# Altium PCB PCB1.PcbDoc (part 2 of 3)
Units mm, origin at the board's own origin, x right, y up, seen from the top; angles counter-clockwise.
Board outline 80 x 55 mm, 4 copper layers (Top Layer, Inner Layer 1, Inner Layer 2, Bottom Layer 1), stack 0.603 mm thick; 136 components, 94 nets, 499 pads, 245 vias.
Unrouted connection lines stored in the file: 1.
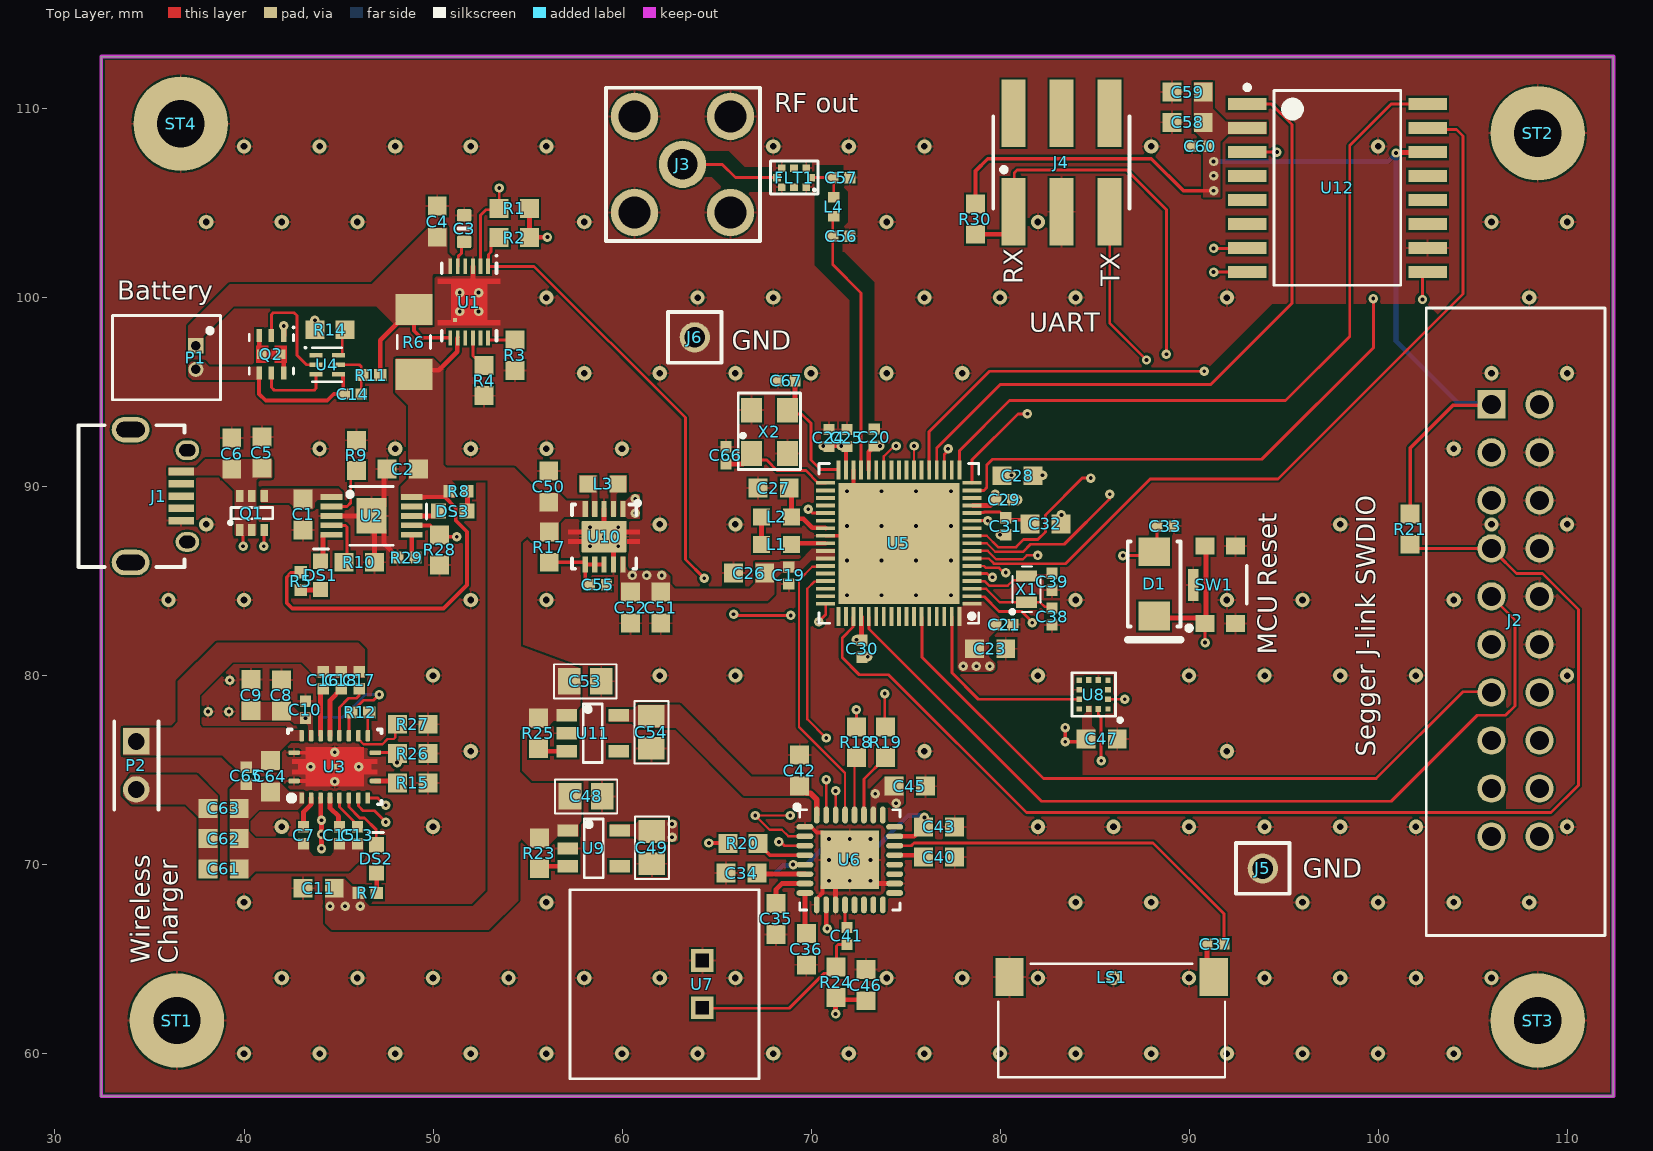
[diagram p0: Top Layer view]

## Part data (continued)
L4: library part CMP-006-00031-2, "MURATA - LQG15HS2N7S02D - INDUCTOR, 2.7NH, 0.8A, 0402, MULTILAYER", Case Code (Imperial)=0402, Case Code (Metric)=1005, Current Rating=300mA, DC Resistance (DCR)=150mR, Inductance=2.7nH, Max Operating Temperature=125°C, Min Operating Temperature=-55°C, Package Quantity=10000, Self Resonant Frequency=6GHz, Test Frequency=100MHz, Case/Package=0402, Core Material=Air, DC Current=300mA, Depth=0.55mm, Height=0.5mm, Height - Seated (Max)=0.022inch, Lead Free="Lead Free", Length=1mm, Max DC Current=300mA, Mfr. Part No.=LQG15HS2N7S02D, Military Standard=Not, Mount="Surface Mount", Packaging="Tape and Reel", Q Factor=8, Radiation Hardening=No, Rated Current-Max=300mA, RoHS Compliant=Yes, Series=LQG15HS, Shielding=Unshielded, Termination=SMD/SMT, Width=0.5mm
LS1: library part CMP-00027-00003-2, "SPEAKER, 12 X 6 MM, 2 MM DEEP, M", Frequency=540Hz, IP Rating=IP67, Manufacturer="CUI Devices", Impedance=32R, Mfr. Part No.=CMR-12062S-67, Sound Pressure Level=120dB
P1: library part CMP-002-00086-2, "MOLEX - 53048-0210 - Wire-To-Board Connector, Right Angle, 1.25 mm, 2 Contacts, Header, PicoBlade 53048 Series", Color=Natural, Contact Resistance=20mR, Current Rating=1A, Flammability Rating="UL94 V-0", Insulation Resistance=100MR, Max Operating Temperature=85°C, Min Operating Temperature=-40°C, Package Quantity=5000, Voltage Rating=125V, Connector Type=Header, Contact Material=Bronze,Brass,Tin, Contact Plating=Tin, Gender=Male, Glow Wire Compliant=Non-compliant, Housing Color=Natural, Housing Material=Nylon, Lead Free="Lead Free", Mount="Through Hole", Number of Circuits=2, Number of Contacts=2, Number of Positions=2, Number of Rows=1, Orientation="Right Angle", Packaging=Tray, Pitch=1.25mm, Radiation Hardening=No, REACH SVHC=Unknown, RoHS Compliant=Yes, Series=PicoBlade, Termination="Through Hole", Voltage Rating (DC)=125V
P2: library part CMP-002-00087-2, "AMPMODU 2 Position 2.54 mm Single Row Through-Hole Straight Breakaway Header", Color=Black, Contact Current Rating=5A, Current Rating=3A, Flammability Rating="UL94 V-0", High Temperature Housing=Yes, Max Operating Temperature=105°C, Min Operating Temperature=-65°C, Package Quantity=500, Approvals=CSA, Board Standoff="No (Without)", Connector Type=Header, Contact Finish - Mating=GOLD, Contact Gender=Male, Contact Material="Copper Alloy", Contact Mating Length=0.23inch, Contact Plating=Gold,Tin,Lead,Matte, Contact Post Length=0.12inch, Contact Protection="No (Without)", Contact Shape=Square, Contact Type="Male Pin", Depth=2.34mm, Fastening Type=Pull, Gasket="No (Without)", High Speed Serial Data Connector=No, Housing Color=Black, Housing Material=Polymer, Insulation Color=Black, Insulation Material=Polymer, Keyed=No, Length=4.67mm, Mating Alignment="No (Without)", Mating Connector Lock="No (Without)", Mfr. Part No.=5-146280-2, Mount="Through Hole", Number of Contacts=2, Number of Positions=2, Number of Rows=1, Orientation=Straight, Packaging=Carton, PCB Mount Retention=Without, PCB Mounting Orientation=Vertical, PCB Thickness=0.063inch, Pins=2, Pitch=2.54mm, Radiation Hardening=No, Row Spacing=2.54mm, Selectively Loaded="No (Without)", Series="AMPMODU MOD II", Stabilizers="No (Without)", Termination="Through Hole"
Q1: library part CMP-013-00036-1, "MOSFET -20V 41mOhm@4.5V 4A P-Ch G-III", Case/Package=SOT-363, Continuous Drain Current (ID)=4A, Drain to Source Breakdown Voltage=-20V, Drain to Source Resistance=41mR, Drain to Source Voltage (Vdss)=20V, Gate to Source Voltage (Vgs)=10V, Max Operating Temperature=150°C, Max Power Dissipation=2.8W, Min Operating Temperature=-55°C, Package Quantity=3000, Power Dissipation=1.6W, Element Configuration=Single, Lead Free="Lead Free", Mount="Surface Mount", Nominal Vgs=-400mV, Number of Channels=1, Number of Elements=1, Number of Pins=6, Packaging="Tape and Reel", Polarity=P-CHANNEL, Radiation Hardening=No, Rds On Max=41mR, REACH SVHC=Unknown, RoHS Compliant=Yes, Series=TrenchFET®, Weight=0.000265oz
Q2: library part CMP-013-00037-4, "MOSFET 2N-CH 20V 5A 6WSON", Continuous Drain Current (ID)=5A, Drain to Source Resistance=23mR, Drain to Source Voltage (Vdss)=20V, Gate to Source Voltage (Vgs)=10V, Input Capacitance=469pF, Max Operating Temperature=150°C, Max Power Dissipation=2.3W, Min Operating Temperature=-55°C, Package Quantity=3000, Contact Plating=Tin, Element Configuration=Dual, Fall Time=15ns, FET Type="2 N-Channel", Height=0.8mm, Lead Free="Lead Free", Length=2.1mm, Mfr. Part No.=CSD85301Q2, Mount="Surface Mount", Number of Channels=2, Number of Pins=6, Packaging="Tape and Reel", Rds On Max=27mR, Rise Time=26ns, RoHS Compliant=Yes, Turn-Off Delay Time=14ns, Turn-On Delay Time=6ns, Weight=0.000342oz, Width=2.1mm
R1 R2 R20 R26 R28: library part CMP-009-00190-3, "RESISTOR, 0603, 0.1W, 1%, 4K7", Case Code (Imperial)=0603, Case Code (Metric)=1608, Max Operating Temperature=155°C, Max Power Dissipation=100mW, Min Operating Temperature=-55°C, Package Quantity=1, Resistance=4.7k, Resistance Tolerance=1%, Resistor Type="Thick Film", Temperature Coefficient=100ppm/°C, Voltage Rating=75V, Case/Package=0603, Construction=Rectangular, Contact Plating=Tin, Depth=0.8mm, Features="Automotive AEC-Q200", Height=0.022inch, Lead Free="Lead Free", Length=1.6mm, Military Standard=Not, Mount="Surface Mount", Number of Pins=2, Number of Terminations=2, Packaging="Tape and Reel", Power Rating=100mW, Radiation Hardening=No, REACH SVHC="No SVHC", RoHS Compliant=Yes, Series=ERJ, Size Code=0603, Termination=SMD/SMT, Tolerance=1%, Voltage Rating (DC)=75V, Weight=7.1E-05oz, Width=0.031inch
R3 R4: library part CMP-009-00008-3, "Res Thick Film 0603 1M Ohm 5% 1/10W ±200ppm/C Molded SMD SMD Paper Tape on Plastic Reel", Case Code (Imperial)=0603, Case Code (Metric)=1608, Max Operating Temperature=155°C, Max Power Dissipation=100mW, Min Operating Temperature=-55°C, Package Quantity=1, Resistance=1MR, Resistor Type="Thick Film", Temperature Coefficient=200ppm/°C, Tolerance=5%, Voltage Rating=50V, Case/Package=0603, Construction=Rectangular, Contact Plating=Tin, Depth=0.8mm, Features="Moisture Resistant", Height=0.022inch, Length=1.6mm, Mfr. Part No.=CR0603-JW-105ELF, Military Standard=Not, Mount="Surface Mount", Number of Terminations=2, Packaging="Tape and Reel", Power Rating=100mW, Radiation Hardening=No, RoHS Compliant=Yes, Series=CR0603, Termination=SMD/SMT, Thickness=457um, Width=0.031inch
R5 R7 R8 R12: library part CMP-009-00196-6, "Res Thick Film 0402 422 Ohm 1% 0.1W(1/10W) ±100ppm/C Molded SMD Automotive Punched T/R", Case Code (Imperial)=0402, Case Code (Metric)=1005, Max Operating Temperature=155°C, Max Power Dissipation=100mW, Min Operating Temperature=-55°C, Package Quantity=1, Resistance=422R, Resistance Tolerance=1%, Resistor Type="Thick Film", Temperature Coefficient=100ppm/°C, Voltage Rating=50V, Case/Package=0402, Construction=Rectangular, Contact Plating=Tin, Depth=0.5mm, Features="Automotive AEC-Q200", Height=0.35mm, Lead Free="Lead Free", Length=1mm, Mfr. Part No.=ERJ-2RKF4220X, Military Standard=Not, Mount="Surface Mount", Number of Terminations=2, Packaging="Tape and Reel", Power Rating=100mW, REACH SVHC="No SVHC", RoHS Compliant=Yes, Series=ERJ, Technology="THICK FILM", Termination=SMD/SMT, Tolerance=1%, Voltage Rating (DC)=50V, Width=0.02inch
R6: library part CMP-009-00007-1, "Res Metal Strip 1206 0.02 Ohm 1% 1W 75ppm/C Molded SMD SMD T/R", Case Code (Imperial)=1206, Case Code (Metric)=3216, Max Operating Temperature=170°C, Max Power Dissipation=1W, Min Operating Temperature=-65°C, Package Quantity=1, Resistance=20mR, Resistance Tolerance=1%, Resistor Type="Metal Strip", Temperature Coefficient=75ppm/°C, Case/Package=1206, Construction=Rectangular, Depth=1.6mm, Features="Moisture Resistant", Height=0.035inch, Lead Free="Lead Free", Length=3.2mm, Mfr. Part No.=WSLP1206R0200FEA, Military Standard=Not, Mount="Surface Mount", Number of Terminations=2, Packaging="Tape and Reel", Power Rating=1W, Radiation Hardening=No, REACH SVHC=Unknown, RoHS Compliant=Yes, Series=WSLP, Size Code=1206, Termination=SMD/SMT, Tolerance=1%, Width=1.6mm
R9: library part CMP-009-00005-3, "Resistor, Thick Film; 1.1 Kilohms; 0.10 W @   degC; + 1%; 75 V; 0603; -55  degC", Case Code (Imperial)=0603, Case Code (Metric)=1608, Max Operating Temperature=155°C, Max Power Dissipation=100mW, Min Operating Temperature=-55°C, Package Quantity=10, Resistance=1.1kR, Resistance Tolerance=1%, Resistor Type="Thick Film", Temperature Coefficient=100ppm/°C, Voltage Rating=75V, Case/Package=0603, Construction=Rectangular, Contact Plating=Tin, Depth=0.85mm, Features="Automotive AEC-Q200", Height=0.02inch, Lead Free="Lead Free", Length=1.55mm, Mfr. Part No.=CRCW06031K10FKEA, Military Standard=Not, Number of Pins=2, Number of Terminations=2, Packaging="Tape and Reel", Power Rating=100mW, Radiation Hardening=No, REACH SVHC=Unknown, RoHS Compliant=Yes, Series=CRCW, Size Code=0603, Termination=SMD/SMT, Tolerance=1%, Voltage Rating (DC)=75V, Weight=7.1E-05oz, Width=0.033inch
R10 R15: library part CMP-009-00002-3, "Res Thick Film 0603 2.4K Ohm 1% 0.1W(1/10W) }100ppm/C Molded SMD Automotive Punched T/R", Case Code (Imperial)=0603, Case Code (Metric)=1608, Max Operating Temperature=155°C, Max Power Dissipation=100mW, Min Operating Temperature=-55°C, Package Quantity=1, Resistance=2.4kR, Resistance Tolerance=1%, Resistor Type="Thick Film", Temperature Coefficient=100ppm/°C, Voltage Rating=75V, Case/Package=0603, Construction=Rectangular, Contact Plating=Tin, Depth=0.8mm, Features="Automotive AEC-Q200", Height=0.022inch, Lead Free="Lead Free", Length=1.6mm, Mfr. Part No.=ERJ-3EKF2401V, Military Standard=Not, Mount="Surface Mount", Number of Terminations=2, Packaging="Tape and Reel", Power Rating=100mW, Radiation Hardening=No, REACH SVHC="No SVHC", RoHS Compliant=Yes, Series=ERJ, Termination=SMD/SMT, Tolerance=1%, Voltage Rating (DC)=75V, Width=0.031inch
R11 R16: library part CMP-009-00197-4, "SMD Chip Resistor, 0402 [1005 Metric], 200 ohm, CRCW e3 Series, 50 V, Thick Film, 63 mW", Case Code (Imperial)=0402, Case Code (Metric)=1005, Max Operating Temperature=155°C, Max Power Dissipation=63mW, Min Operating Temperature=-55°C, Package Quantity=10, Resistance=200R, Resistance Tolerance=1%, Resistor Type="Thick Film", Temperature Coefficient=100ppm/°C, Voltage Rating=50V, Case/Package=0402, Construction=Rectangular, Contact Plating=Tin, Depth=0.5mm, Features="Automotive AEC-Q200", Height=0.35mm, Lead Free="Lead Free", Length=1mm, Mfr. Part No.=CRCW0402200RFKED, Military Standard=Not, Mount="Surface Mount", Number of Pins=2, Number of Terminations=2, Packaging="Tape and Reel", Power Rating=63mW, Radiation Hardening=No, REACH SVHC=Unknown, RoHS Compliant=Yes, Series=CRCW, Size Code=0402, Technology="THICK FILM", Termination=SMD/SMT, Tolerance=1%, Voltage Rating (DC)=50V, Weight=2.3E-05oz, Width=0.5mm
R13: library part CMP-009-00198-4, "RES SMD 20K OHM 1% 1/16W 0402", Case Code (Imperial)=0402, Case Code (Metric)=1005, Max Operating Temperature=155°C, Max Power Dissipation=63mW, Min Operating Temperature=-55°C, Package Quantity=10, Resistance=20kR, Resistance Tolerance=1%, Resistor Type="Thick Film", Temperature Coefficient=100ppm/°C, Voltage Rating=50V, Case/Package=0402, Construction=Rectangular, Contact Plating=Tin, Depth=0.5mm, Features="Automotive AEC-Q200", Height=0.35mm, Lead Free="Lead Free", Length=1mm, Mfr. Part No.=CRCW040220K0FKED, Military Standard=Not, Mount="Surface Mount", Number of Pins=2, Number of Terminations=2, Packaging="Tape and Reel", Power Rating=63mW, Radiation Hardening=No, REACH SVHC=Unknown, RoHS Compliant=Yes, Series=CRCW, Technology="THICK FILM", Termination=SMD/SMT, Tolerance=1%, Voltage Rating (DC)=50V, Weight=2.3E-05oz, Width=0.5mm, Working Voltage=50V
R14 R30: library part CMP-009-00195-3, "VISHAY - CRCW060322K0FKEA - Surface Mount Thick Film Resistor, AEC-Q200 CRCW Series, 22 kohm, 100 mW, - 1%, 75 V RoHS Compliant: Yes", Case Code (Imperial)=0603, Case Code (Metric)=1608, Max Operating Temperature=155°C, Max Power Dissipation=100mW, Min Operating Temperature=-55°C, Package Quantity=10, Resistance=22kR, Resistance Tolerance=1%, Resistor Type="Thick Film", Temperature Coefficient=100ppm/°C, Voltage Rating=75V, Case/Package=0603, Construction=Rectangular, Contact Plating=Tin, Depth=0.85mm, Features="Automotive AEC-Q200", Height=0.45mm, Lead Free="Lead Free", Length=1.55mm, Military Standard=Not, Mount="Surface Mount", Number of Terminations=2, Packaging="Tape and Reel", Power Rating=100mW, Radiation Hardening=No, REACH SVHC=Unknown, RoHS Compliant=Yes, Series=CRCW, Size Code=0603, Technology="THICK FILM", Termination=SMD/SMT, Tolerance=1%, Voltage Rating (DC)=75V, Weight=7.1E-05oz, Width=0.85mm
R17: library part CMP-009-00009-4, "Res Thick Film 0603 100 Ohm 1% 1/10W ±100ppm/°C Molded SMD Paper T/R", Case Code (Imperial)=0603, Case Code (Metric)=1608, Max Operating Temperature=155°C, Max Power Dissipation=100mW, Min Operating Temperature=-55°C, Package Quantity=10, Resistance=100R, Resistance Tolerance=1%, Resistor Type="Thick Film", Temperature Coefficient=100ppm/°C, Voltage Rating=75V, Case/Package=0603, Construction=Rectangular, Contact Plating=Tin, Depth=0.85mm, Features="Automotive AEC-Q200", Height=0.02inch, Lead Free="Lead Free", Length=1.55mm, Mfr. Part No.=CRCW0603100RFKEA, Military Standard=Not, Mount="Surface Mount", Number of Pins=2, Number of Terminations=2, Packaging="Tape and Reel", Power Rating=100mW, Radiation Hardening=No, REACH SVHC=Unknown, RoHS Compliant=Yes, Series=CRCW, Size Code=0603, Termination=SMD/SMT, Tolerance=1%, Voltage Rating (DC)=75V, Weight=7.1E-05oz, Width=0.033inch
R18 R19 R23 R25: library part CMP-009-00175-4, Case/Package=0603, Max Operating Temperature=155°C, Min Operating Temperature=-55°C, Pins=2
R21: library part CMP-009-00023-8, "Chip Resistor, 100 KOhm, +/- 1%, 0.1 W, -55 to 155 degC, 0603 (1608 Metric)", Case/Package=0603, Max Operating Temperature=155°C, Min Operating Temperature=-55°C, Power=100mW, Resistance=100k, Tolerance=1%, Voltage Rating=50V, Mounting Technology=SM, Pins=2, RoHS Compliant=True